# EAGLE board SoftDrink-BoardFile (EAGLE 9.2.2)
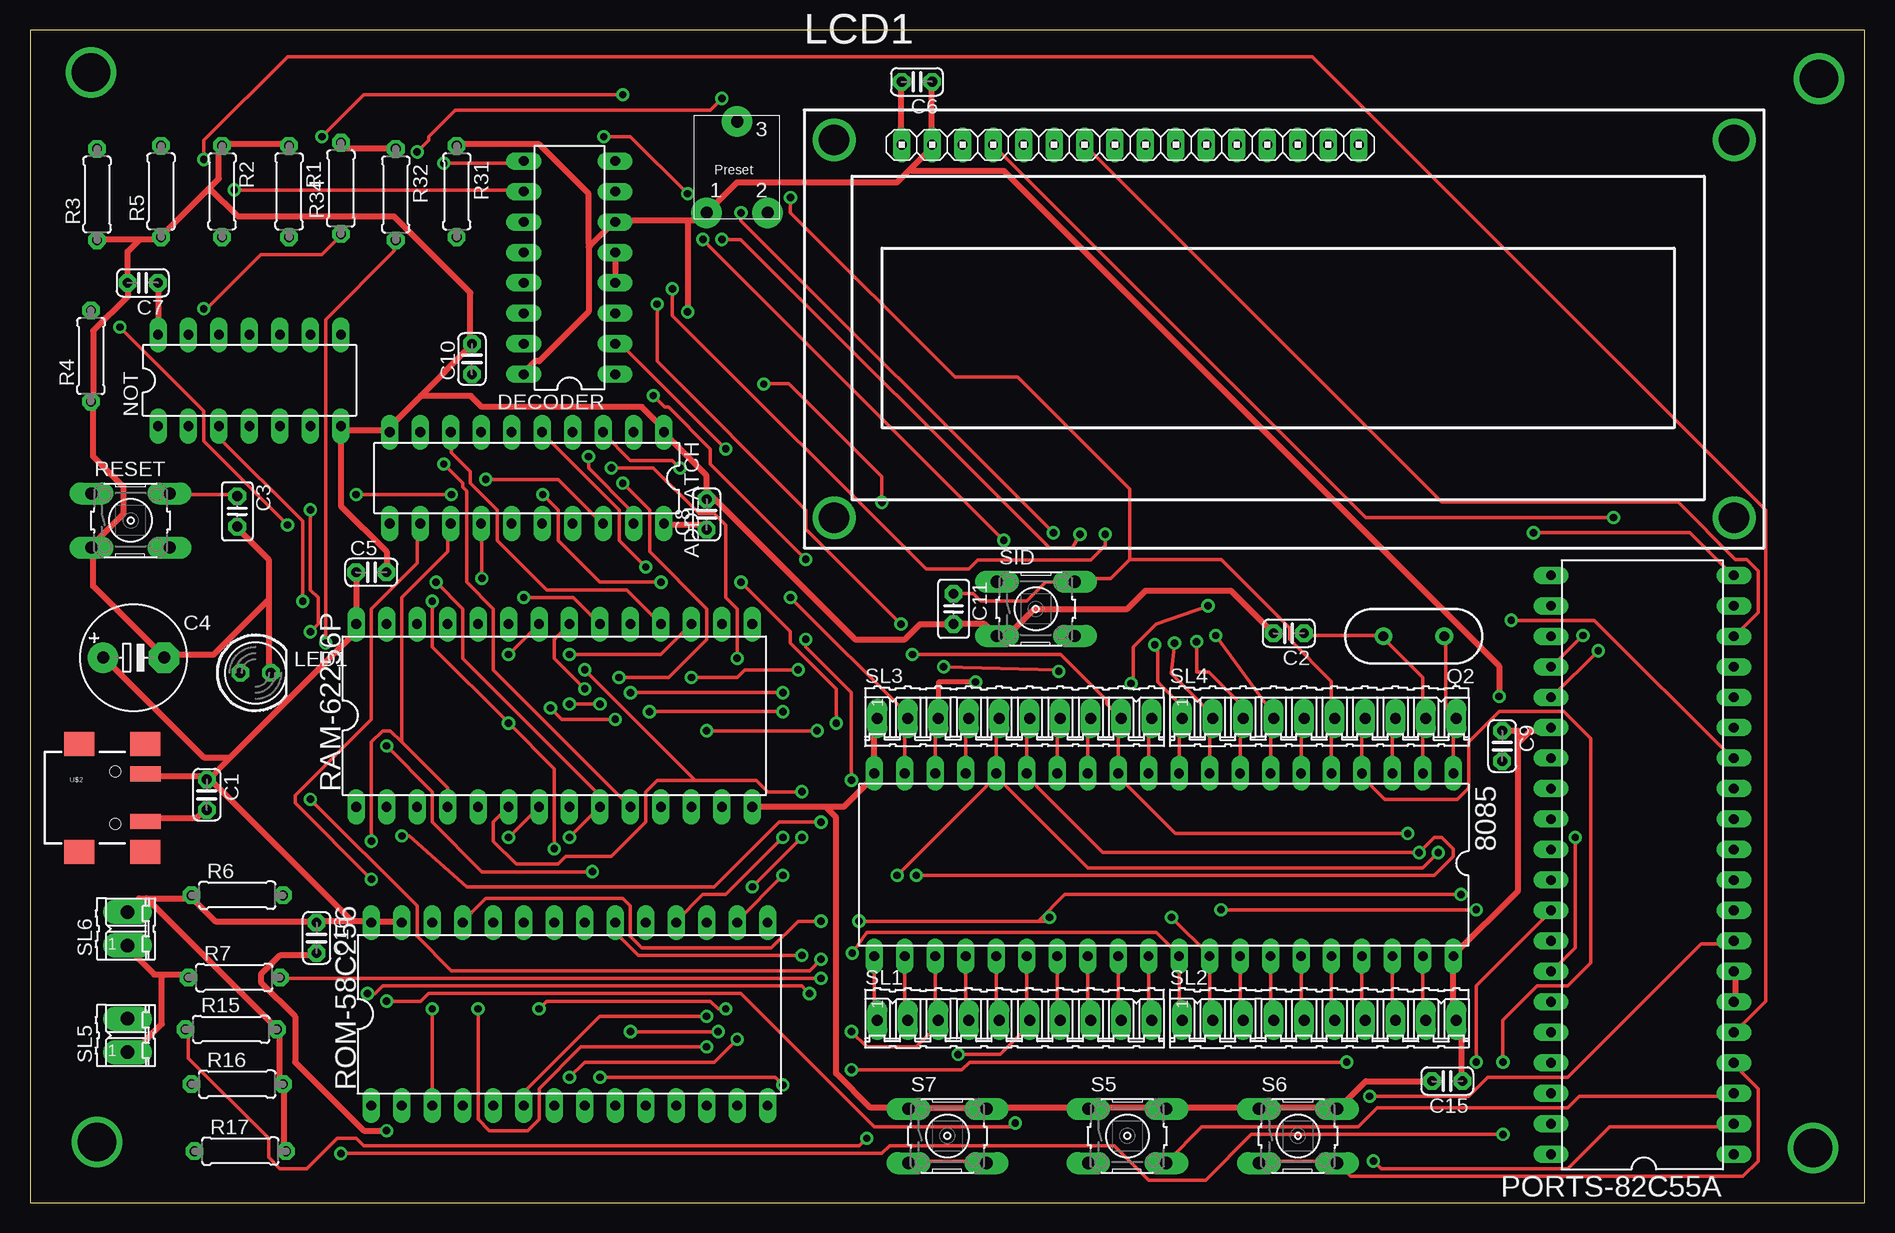
[diagram p0: board, top side]
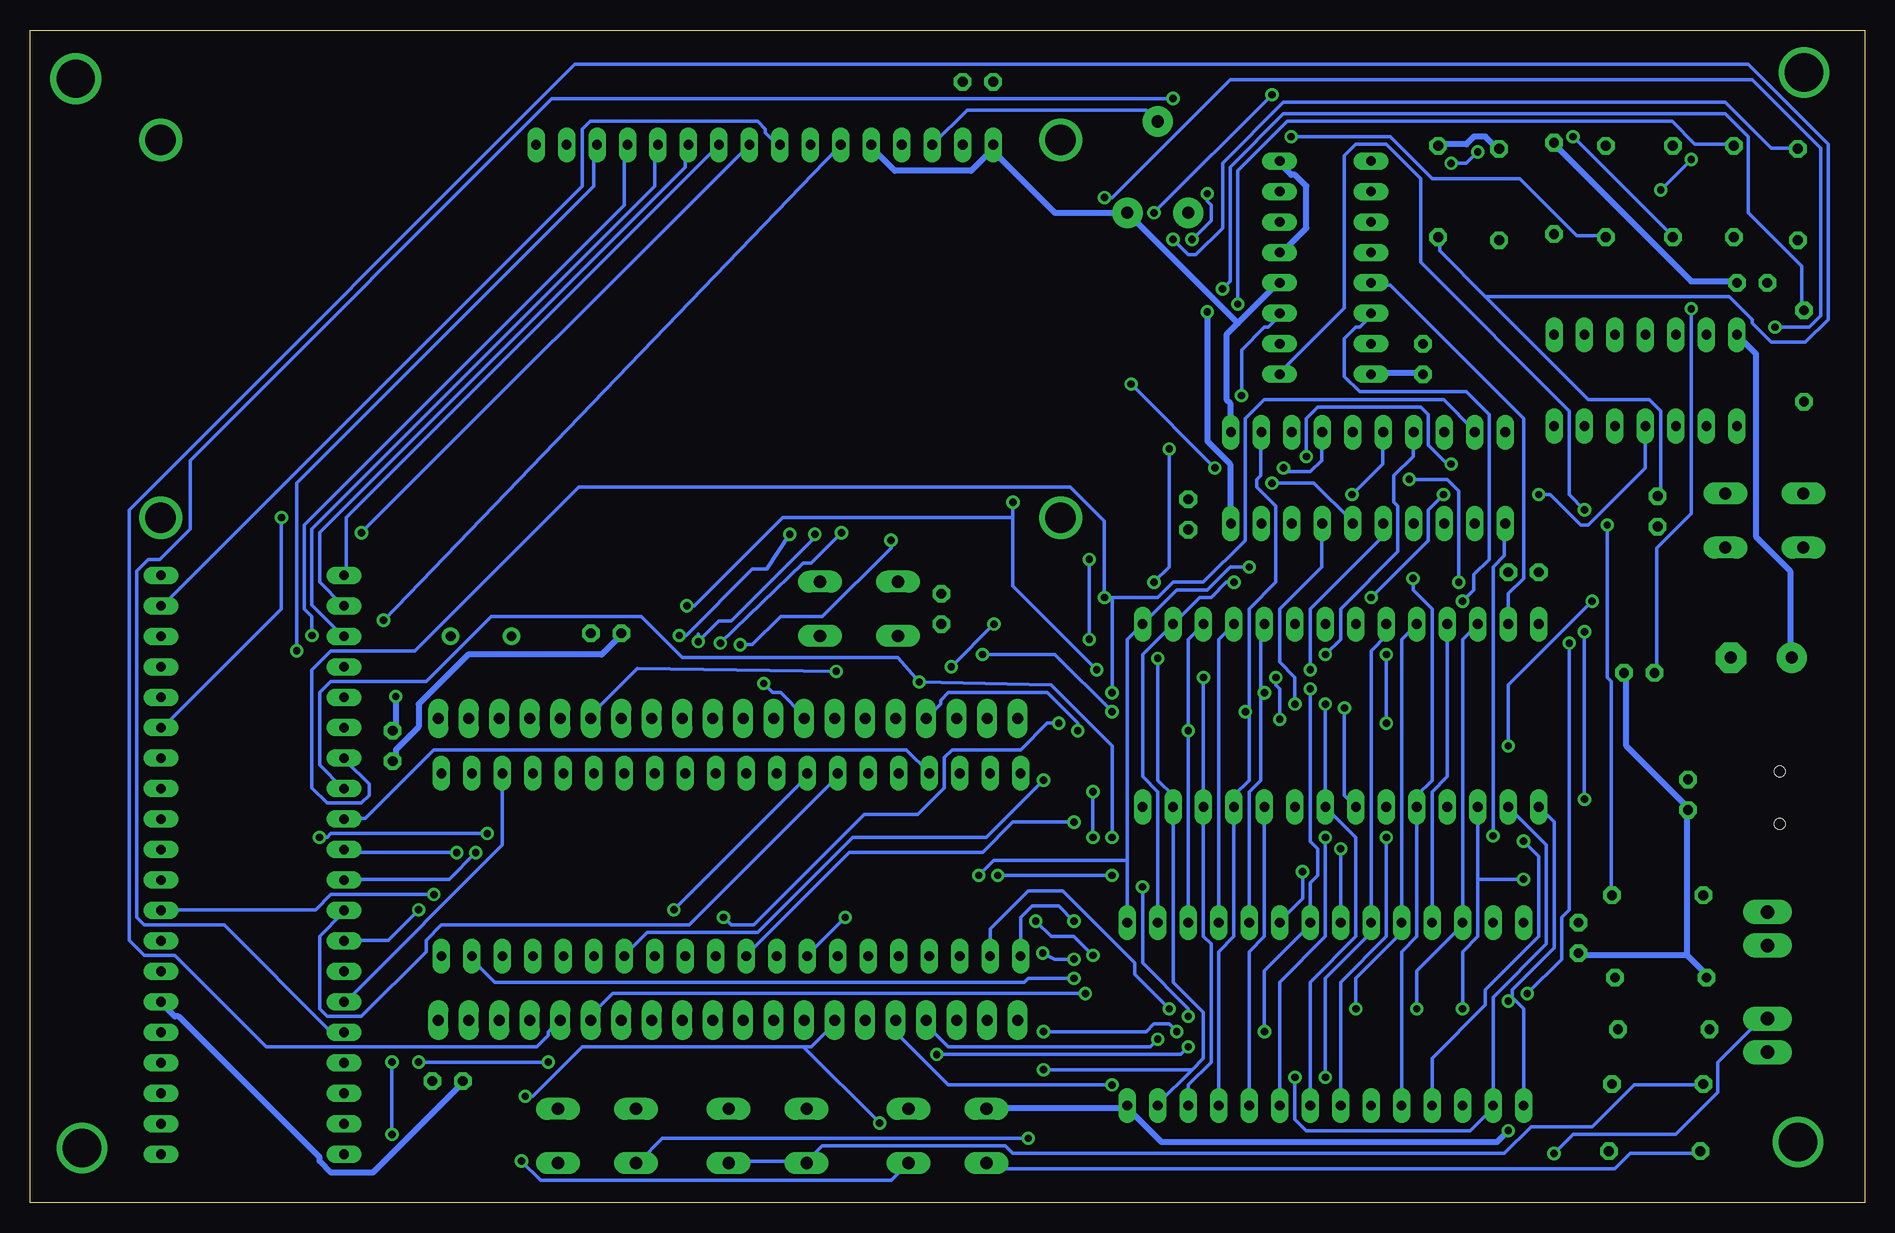
[diagram p1: board, bottom side, seen from below]

Size 152.91 x 97.79 mm. Coordinates in mm from the lower left corner, seen from the top.
Outline: 0,0 152.91,0 152.91,97.79 0,97.79 0,0
Copper layers (1*16): Top 0.035mm / dielectric 1.5mm / Bottom 0.035mm
Design rules "default *": minimum track width 10mil, minimum drill 24mil, track to track 12mil, track to pad 12mil, pad to pad 12mil, via to via 12mil, smd to smd 12mil, copper to edge 40mil, drill to drill 8mil, minimum pad ring 12mil, minimum via ring 8mil, stop-mask expansion 4mil, vias tented up to drill 0mil, thermal gap 10mil
Net classes: 0 default: width 0.305 mm; 1 VCC: width 0.508 mm; 2 GND: width 0.508 mm

## Footprints (pad centres in the part's own frame; a part is rotated, then mirrored left to right if it is on the bottom)
DIL40 = drill 0.813 long: 1 -24.13,-7.62; 2 -21.59,-7.62; 3 -19.05,-7.62; 4 -16.51,-7.62; 5 -13.97,-7.62; 6 -11.43,-7.62; 7 -8.89,-7.62; 8 -6.35,-7.62; 9 -3.81,-7.62; 10 -1.27,-7.62; 11 1.27,-7.62; 12 3.81,-7.62; 13 6.35,-7.62; 14 8.89,-7.62; 15 11.43,-7.62; 16 13.97,-7.62; 17 16.51,-7.62; 18 19.05,-7.62; 19 21.59,-7.62; 20 24.13,-7.62; 21 24.13,7.62; 22 21.59,7.62; 23 19.05,7.62; 24 16.51,7.62; 25 13.97,7.62; 26 11.43,7.62; 27 8.89,7.62; 28 6.35,7.62; 29 3.81,7.62; 30 1.27,7.62; 31 -1.27,7.62; 32 -3.81,7.62; 33 -6.35,7.62; 34 -8.89,7.62; 35 -11.43,7.62; 36 -13.97,7.62; 37 -16.51,7.62; 38 -19.05,7.62; 39 -21.59,7.62; 40 -24.13,7.62
DIL20 = drill 0.813 long: 1 -11.43,-3.81; 2 -8.89,-3.81; 3 -6.35,-3.81; 4 -3.81,-3.81; 5 -1.27,-3.81; 6 1.27,-3.81; 7 3.81,-3.81; 8 6.35,-3.81; 9 8.89,-3.81; 10 11.43,-3.81; 11 11.43,3.81; 12 8.89,3.81; 13 6.35,3.81; 14 3.81,3.81; 15 1.27,3.81; 16 -1.27,3.81; 17 -3.81,3.81; 18 -6.35,3.81; 19 -8.89,3.81; 20 -11.43,3.81
C025-024X044 = drill 0.813 octagon: 1 -1.27,0; 2 1.27,0
C025-025X050 = drill 0.813 octagon: 1 -1.27,0; 2 1.27,0
E5-8,5 = drill 1.016 pad 2.54: + -2.54,0 | drill 1.016 pad 2.54 octagon: - 2.54,0
DIL16 = drill 0.813 long: 1 -8.89,-3.81; 2 -6.35,-3.81; 3 -3.81,-3.81; 4 -1.27,-3.81; 5 1.27,-3.81; 6 3.81,-3.81; 7 6.35,-3.81; 8 8.89,-3.81; 9 8.89,3.81; 10 6.35,3.81; 11 3.81,3.81; 12 1.27,3.81; 13 -1.27,3.81; 14 -3.81,3.81; 15 -6.35,3.81; 16 -8.89,3.81
16X2_LCD = drill 0.813 long: 1 8.12,33.608; 2 10.66,33.608; 3 13.2,33.608; 4 15.74,33.608; 5 18.28,33.608; 6 20.82,33.608; 7 23.36,33.608; 8 25.9,33.608; 9 28.44,33.608; 10 30.98,33.608; 11 33.52,33.608; 12 36.06,33.608; 13 38.6,33.608; 14 41.14,33.608; 15 43.68,33.608; 16 46.22,33.608 | drill 2.54: P$1 2.5,34; P$2 2.5,2.5; P$3 77.5,2.5; P$4 77.5,34
LED5MM = drill 0.813 octagon: A -1.27,0; K 1.27,0
DIL14 = drill 0.813 long: 1 -7.62,-3.81; 2 -5.08,-3.81; 3 -2.54,-3.81; 4 0,-3.81; 5 2.54,-3.81; 6 5.08,-3.81; 7 7.62,-3.81; 8 7.62,3.81; 9 5.08,3.81; 10 2.54,3.81; 11 0,3.81; 12 -2.54,3.81; 13 -5.08,3.81; 14 -7.62,3.81
HC49US = drill 0.813: 1 -2.54,0; 2 2.54,0
0207/7 = drill 0.813 octagon: 1 -3.81,0; 2 3.81,0
DIL28-6 = drill 0.813 long: 1 -16.51,-7.62; 2 -13.97,-7.62; 3 -11.43,-7.62; 4 -8.89,-7.62; 5 -6.35,-7.62; 6 -3.81,-7.62; 7 -1.27,-7.62; 8 1.27,-7.62; 9 3.81,-7.62; 10 6.35,-7.62; 11 8.89,-7.62; 12 11.43,-7.62; 13 13.97,-7.62; 14 16.51,-7.62; 15 16.51,7.62; 16 13.97,7.62; 17 11.43,7.62; 18 8.89,7.62; 19 6.35,7.62; 20 3.81,7.62; 21 1.27,7.62; 22 -1.27,7.62; 23 -3.81,7.62; 24 -6.35,7.62; 25 -8.89,7.62; 26 -11.43,7.62; 27 -13.97,7.62; 28 -16.51,7.62
B3F-10XX = drill 1.016 long: 1 -3.251,2.261; 2 3.251,2.261; 3 -3.251,-2.261; 4 3.251,-2.261
10P = drill 0.914 long: 1 -11.43,0; 2 -8.89,0; 3 -6.35,0; 4 -3.81,0; 5 -1.27,0; 6 1.27,0; 7 3.81,0; 8 6.35,0; 9 8.89,0; 10 11.43,0
02P = drill 1.143 long: 1 -1.397,0; 2 1.397,0
USB(POWER) = smd 2.54 x 1.27: GND 2.5,-1.981; VBUS 2.5,1.981 | smd 2.5 x 2: GND@1 -3,-4.5; GND@2 -3,4.5; GND@3 2.5,4.5; GND@4 2.5,-4.5 | hole 0.9: 0,2.2; 0,-2.2
PRESET_LR = drill 1.016 pad 2.54: P$1 -2.54,-3.81; P$2 2.54,-3.81; P$3 0,3.81

## Placement (x,y rotation side)
8085  [DIL40]  94.49,28.19 180 top
ADDLATCH  74HCT573N  [DIL20]  41.4,60.45 180 top
C1  0.1uf  [C025-024X044]  14.73,34.04 270 top
C2  22pf  [C025-024X044]  104.9,47.5 180 top
C3  [C025-025X050]  17.27,57.66 270 top
C4  10uF  [E5-8,5]  8.64,45.47 0 top
C5  .1uf  [C025-024X044]  28.45,52.58 0 top
C6  .1uf  [C025-024X044]  73.91,93.47 180 top
C7  0.1uF  [C025-024X044]  9.4,76.71 180 top
C8  .1uf  [C025-024X044]  56.39,57.4 90 top
C9  .1uf  [C025-024X044]  122.68,38.1 270 top
C10  .1uf  [C025-024X044]  36.83,70.36 90 top
C11  [C025-025X050]  76.96,49.53 270 top
C15  0.1uf  [C025-024X044]  118.11,10.16 180 top
C16  .1uf  [C025-024X044]  23.88,22.1 270 top
DECODER  74HCT138N  [DIL16]  44.96,77.98 90 top
LCD1  [16X2_LCD]  64.52,54.61 0 top
LED1  LED5MM  [LED5MM]  18.8,44.2 0 top
NOT  74HCT04N  [DIL14]  18.29,68.58 0 top
PORTS-82C55A  [DIL40]  134.37,28.19 90 top
Q2  [HC49US]  115.32,47.24 180 top
R1  10k  [0207/7]  21.59,84.33 270 top
R2  10k  [0207/7]  16,84.33 270 top
R3  10k  [0207/7]  5.59,84.07 90 top
R4  10k  [0207/7]  5.08,70.61 90 top
R5  10k  [0207/7]  10.92,84.33 90 top
R6  10k  [0207/7]  17.27,25.65 0 top
R7  10k  [0207/7]  17.02,18.8 0 top
R15  10k  [0207/7]  16.76,14.48 0 top
R16  10k  [0207/7]  17.27,9.91 0 top
R17  10k  [0207/7]  17.53,4.32 0 top
R31  10k  [0207/7]  35.56,84.33 270 top
R32  10k  [0207/7]  30.48,84.07 270 top
R34  10k  [0207/7]  25.91,84.58 90 top
RAM-62256P  [DIL28-6]  43.69,40.64 0 top
RESET  [B3F-10XX]  8.38,56.9 0 top
ROM-58C256  [DIL28-6]  44.96,15.75 0 top
S5  [B3F-10XX]  91.44,5.59 0 top
S6  [B3F-10XX]  105.66,5.59 0 top
S7  [B3F-10XX]  76.45,5.59 0 top
SID  [B3F-10XX]  83.82,49.53 0 top
SL1  [10P]  82.04,15.24 0 top
SL2  [10P]  107.44,15.24 0 top
SL3  [10P]  82.04,40.39 0 top
SL4  [10P]  107.44,40.39 0 top
SL5  [02P]  8.13,13.97 90 top
SL6  [02P]  8.13,22.86 90 top
U$2  USB(POWER)  [USB(POWER)]  7.11,33.78 0 top
U$3  PRESET_LR  [PRESET_LR]  58.93,86.36 0 top

## Library data of the parts
8085 = micro-intel; OC_FARNELL: unknown; OC_NEWARK: unknown
ADDLATCH DECODER NOT = 74xx-eu
C1-C11 C15 C16 R1-R7 R15-R17 R31 R32 R34 = rcl
LCD1 LED1 S5-S7 = CEDTv79
PORTS-82C55A = micro-intel; MF: INTERSIL; MPN: IP82C55AZ; OC_FARNELL: 1562050; OC_NEWARK: 79K6939
Q2 RESET SID = CEDT
RAM-62256P = memory-hitachi; OC_FARNELL: unknown; OC_NEWARK: unknown
ROM-58C256 = memory-hitachi; MPN: HN58C256AP85E; OC_FARNELL: 1496447; OC_NEWARK: 61M6616
SL1-SL4 = con-amp-quick; OC_FARNELL: unknown; OC_NEWARK: unknown
SL5 SL6 U$2 U$3 = CEDT_JANUARY_2015_v5

## Nets
A: LCD1.15
A8: 8085.21 RAM-62256P.25 ROM-58C256.25 SL1.1
A9: 8085.22 RAM-62256P.24 ROM-58C256.24 SL1.2
A10: 8085.23 RAM-62256P.21 ROM-58C256.21 SL1.3
A11: 8085.24 RAM-62256P.23 ROM-58C256.23 SL1.4
A12: 8085.25 RAM-62256P.2 ROM-58C256.2 SL1.5
A13: 8085.26 RAM-62256P.26 ROM-58C256.26 SL1.6
A14: 8085.27 PORTS-82C55A.8 RAM-62256P.1 ROM-58C256.1 SL1.7
A15: 8085.28 NOT.3 PORTS-82C55A.9 ROM-58C256.20 SL1.8
AD0: 8085.12 ADDLATCH.2 PORTS-82C55A.34 RAM-62256P.11 ROM-58C256.11 SL3.9
AD1: 8085.13 ADDLATCH.3 PORTS-82C55A.33 RAM-62256P.12 ROM-58C256.12 SL3.8
AD2: 8085.14 ADDLATCH.4 PORTS-82C55A.32 RAM-62256P.13 ROM-58C256.13 SL3.7
AD3: 8085.15 ADDLATCH.5 PORTS-82C55A.31 RAM-62256P.15 ROM-58C256.15 SL3.6
AD4: 8085.16 ADDLATCH.6 PORTS-82C55A.30 RAM-62256P.16 ROM-58C256.16 SL3.5
AD5: 8085.17 ADDLATCH.7 PORTS-82C55A.29 RAM-62256P.17 ROM-58C256.17 SL3.4
AD6: 8085.18 ADDLATCH.8 PORTS-82C55A.28 RAM-62256P.18 ROM-58C256.18 SL3.3
AD7: 8085.19 ADDLATCH.9 PORTS-82C55A.27 RAM-62256P.19 ROM-58C256.19 SL3.2
ALE: 8085.30 ADDLATCH.11 SL1.10
CLK: 8085.37 SL2.7
CNT: LCD1.3 U$3.P$3
D0: LCD1.7 PORTS-82C55A.18
D1: LCD1.8 PORTS-82C55A.19
D2: LCD1.9 PORTS-82C55A.20
D3: LCD1.10 PORTS-82C55A.21
D4: LCD1.11 PORTS-82C55A.22
D5: LCD1.12 PORTS-82C55A.23
D6: LCD1.13 PORTS-82C55A.24
D7: LCD1.14 PORTS-82C55A.25
EN: LCD1.6 PORTS-82C55A.14
GND [GND]: 8085.20 ADDLATCH.1 ADDLATCH.10 C1.2 C2.2 C3.2 C4.- C5.2 C6.2 C7.2 C8.2 C9.2 C10.2 C11.2 C15.2 C16.2 DECODER.4 DECODER.5 DECODER.8 LCD1.1 LCD1.5 LED1.K NOT.7 PORTS-82C55A.6 PORTS-82C55A.7 R1.1 R2.1 R3.1 R4.1 R5.1 R7.1 RAM-62256P.14 RESET.3 ROM-58C256.14 S5.1 S5.2 S6.1 S6.2 S7.1 S7.2 SID.3 SL3.1 SL5.1 SL6.1 U$2.GND U$3.P$2
HLDA: 8085.38 SL2.8
HOLD: 8085.39 R7.2 SL2.9
INTA: 8085.11 SL3.10
INTR: 8085.10 R1.2 SL4.1
IO/M: 8085.34 DECODER.3 SL2.4
K: LCD1.16
N$10: ADDLATCH.19 RAM-62256P.10 ROM-58C256.10
N$11: ADDLATCH.18 RAM-62256P.9 ROM-58C256.9
N$12: ADDLATCH.17 RAM-62256P.8 ROM-58C256.8
N$13: ADDLATCH.16 RAM-62256P.7 ROM-58C256.7
N$14: ADDLATCH.15 RAM-62256P.6 ROM-58C256.6
N$15: ADDLATCH.14 RAM-62256P.5 ROM-58C256.5
N$16: ADDLATCH.13 RAM-62256P.4 ROM-58C256.4
N$17: ADDLATCH.12 RAM-62256P.3 ROM-58C256.3
N$28: DECODER.9 PORTS-82C55A.36
N$44: LED1.A R34.1
N$47: PORTS-82C55A.4 R15.1 S6.3 S6.4
N$49: PORTS-82C55A.2 R17.1 S7.3 S7.4
N$50: PORTS-82C55A.3 R16.1 S5.3 S5.4
N$57: DECODER.14 RAM-62256P.22 ROM-58C256.22
N$58: DECODER.13 RAM-62256P.27
N$60: NOT.4 RAM-62256P.20
N$80: DECODER.10 PORTS-82C55A.5
RD: 8085.32 DECODER.2 SL2.2
READY: 8085.35 R32.2 SL2.5
RES_IN: 8085.36 C3.1 R31.2 RESET.2 SL2.6
RES_OUT: 8085.3 PORTS-82C55A.35 SL4.8
RS: LCD1.4 PORTS-82C55A.15
RST5_5: 8085.9 R2.2 SL4.2
RST6_5: 8085.8 R3.2 SL4.3
RST7_5: 8085.7 R4.2 SL4.4
S0: 8085.29 SL1.9
S1: 8085.33 SL2.3
SID: 8085.5 C11.1 R6.2 SID.2 SL4.6
SOD: 8085.4 SL4.7 SL5.2
TRAP: 8085.6 R5.2 SL4.5
VCC [VCC]: 8085.40 ADDLATCH.20 C1.1 C4.+ C5.1 C6.1 C7.1 C8.1 C9.1 C10.1 C15.1 C16.1 DECODER.6 DECODER.16 LCD1.2 NOT.14 PORTS-82C55A.26 R6.1 R15.2 R16.2 R17.2 R31.1 R32.1 R34.2 RAM-62256P.28 ROM-58C256.27 ROM-58C256.28 SL2.10 SL6.2 U$2.VBUS U$3.P$1
WR: 8085.31 DECODER.1 SL2.1
X1: 8085.1 Q2.1 SL4.10
X2: 8085.2 C2.1 Q2.2 SL4.9

## Tracks (layer width: path | path; a pad name or v marks a point on that pad's centre or on a via)
A8  (via drill 0.61)
  Top 0.305: 8085.21 70.36,15.24 SL1.1 | v65.91,23.5 64.01,23.5 61.79,21.27 50.99,21.27 50.04,22.22 50.04,24.77 49.4,25.4 37.97,25.4 36.07,23.5 ROM-58C256.25
  Bottom 0.305: RAM-62256P.25 34.8,35.56 36.07,34.29 ROM-58C256.25 | 8085.21 70.36,23.81 69.41,24.77 67.18,24.77 v65.91,23.5
A9  (via drill 0.61)
  Top 0.305: 8085.22 72.9,15.24 SL1.2 | v57.98,16.19 57.34,16.19 56.71,16.83 43.05,16.83 v42.42,16.19
  Bottom 0.305: RAM-62256P.24 38.61,46.99 ROM-58C256.24 38.61,22.54 42.42,18.73 v42.42,16.19 | 8085.22 72.9,22.86 69.72,26.04 66.87,26.04 60.83,20 60.83,19.05 v57.98,16.19
A10  (via drill 0.61)
  Top 0.305: 75.44,15.24 8085.23 | v46.23,42.86 43.69,45.4 43.69,46.99 RAM-62256P.21 | 75.44,15.24 75.44,14.61 73.85,13.02 69.72,13.02 v68.45,14.29 | v50.04,14.29 v57.34,14.29 | 75.44,15.24 SL1.3
  Bottom 0.305: v46.23,42.86 46.23,30.16 45.59,29.53 45.59,27.3 46.23,26.67 ROM-58C256.21 46.23,23.18 50.04,19.37 v50.04,14.29 | v68.45,14.29 59.88,14.29 59.25,14.92 57.98,14.92 v57.34,14.29
A11  (via drill 0.61)
  Top 0.305: 8085.24 77.98,15.24 SL1.4 | v58.93,13.65 57.02,11.75 46.23,11.75 v44.96,10.48
  Bottom 0.305: RAM-62256P.23 39.88,47.31 41.15,46.04 ROM-58C256.23 41.15,22.54 44.96,18.73 v44.96,10.48 | v58.93,13.65 59.56,13.02 76.39,13.02 77.98,14.61 77.98,15.24 SL1.4
A12  (via drill 0.61)
  Top 0.305: 8085.25 80.52,15.24 SL1.5 | v62.74,9.84 62.1,10.48 v47.5,10.48
  Bottom 0.305: RAM-62256P.2 26.54,29.84 26.54,21.59 30.99,17.14 ROM-58C256.2 30.99,7.94 32.89,6.03 46.55,6.03 47.5,6.98 v47.5,10.48 | v62.74,9.84 76.39,9.84 80.52,13.97 80.52,15.24 SL1.5
A13  (via drill 0.61)
  Top 0.305: 83.06,15.24 8085.26 | 83.06,15.24 83.06,14.61 80.84,12.38 v77.34,12.38 | v56.39,13.02 45.91,13.02 42.42,9.53 42.42,6.98 41.47,6.03 38.29,6.03 37.34,6.98 v37.34,16.19 | 83.06,15.24 SL1.6
  Bottom 0.305: RAM-62256P.26 33.53,46.99 ROM-58C256.26 33.53,23.18 37.34,19.37 v37.34,16.19 | v77.34,12.38 57.02,12.38 v56.39,13.02
A14  (via drill 0.61)
  Top 0.305: 8085.27 85.6,15.24 SL1.7 | v111.63,8.89 119.89,8.89 121.48,10.48 128.14,10.48 139.25,21.59 141.8,21.59 PORTS-82C55A.8 | v29.72,16.83 32.58,16.83 33.21,17.46 59.25,17.46 70.36,6.35 81.79,6.35 v82.11,6.67
  Bottom 0.305: ROM-58C256.1 28.45,16.19 29.4,17.14 | 29.4,17.14 29.4,17.78 25.91,21.27 25.91,31.75 RAM-62256P.1 | v111.63,8.89 111,8.89 106.87,13.02 88.46,13.02 | 88.46,13.02 87.82,13.02 85.6,15.24 SL1.7 | v29.72,16.83 29.4,17.14 | 88.46,13.02 v82.11,6.67
A15  (via drill 0.61)
  Top 0.305: ROM-58C256.20 48.77,22.54 50.67,20.64 v64.33,20.64 | 84.01,23.5 84.65,23.5 v84.96,23.81 | 84.01,23.5 v69.09,23.5 | NOT.3 15.75,63.82 22.73,56.83 v22.73,50.17 | v29.72,38.1 33.53,34.29 33.53,31.75 37.66,27.62 v46.86,27.62 | v119.25,25.72 86.23,25.72 84.01,23.5 | 8085.28 88.14,15.24 SL1.8
  Bottom 0.305: v64.33,20.64 65.91,22.22 67.82,22.22 v69.09,23.5 | v84.96,23.81 88.14,20.64 8085.28 | v22.73,50.17 29.72,43.18 v29.72,38.1 | v46.86,27.62 46.86,25.4 48.77,23.5 ROM-58C256.20 | v119.25,25.72 127.83,25.72 129.09,24.45 141.8,24.45 PORTS-82C55A.9
AD0  (via drill 0.61)
  Top 0.305: v128.78,30.48 128.78,21.27 126.87,19.37 PORTS-82C55A.34 | v114.81,30.8 95.44,30.8 90.68,35.56 8085.12 90.68,40.32 SL3.9 89.73,41.59 89.73,41.91 85.92,45.72 v73.53,45.72 | v51.62,40.96 v62.74,40.96
  Bottom 0.305: v128.78,30.48 128.14,30.48 127.83,30.8 v114.81,30.8 | ROM-58C256.11 53.85,20.95 52.58,22.22 RAM-62256P.11 52.58,33.97 51.31,35.24 51.31,40.96 | 51.31,40.96 51.31,49.53 49.09,51.75 49.09,58.1 50.67,59.69 50.67,60.33 50.36,60.64 50.36,64.14 ADDLATCH.2 | v73.53,45.72 67.5,45.72 v62.74,40.96 | 51.31,40.96 v51.62,40.96
AD1  (via drill 0.61)
  Top 0.305: 8085.13 88.14,40.32 SL3.8 | v99.25,24.45 v120.52,24.45 | v54.17,61.28 53.53,61.91 50.04,61.91 47.82,64.14 ADDLATCH.3 | v64.01,44.45 59.56,44.45 58.93,43.82 v55.12,43.82 | v98.17,49.78 93.85,48.26 91.95,46.36 91.95,43.62 v91.76,43.31 | v70.99,58.42 70.99,60.58 63.25,68.33 61.21,68.33 v61.15,68.26
  Bottom 0.305: v120.52,24.45 123.06,21.91 126.56,21.91 PORTS-82C55A.33 | v99.25,24.45 88.14,35.56 8085.13 | ROM-58C256.12 56.39,9.84 54.48,11.75 54.48,21.59 55.12,22.22 RAM-62256P.12 v55.12,43.82 | v61.15,68.26 v54.17,61.28 | 70.99,57.15 70.99,51.44 v64.01,44.45 | 70.99,57.15 v70.99,58.42 | 70.99,57.15 90.17,57.15 97.54,49.78 v98.17,49.78 | SL3.8 88.46,40.64 90.36,42.55 91,42.55 v91.76,43.31
AD2  (via drill 0.61)
  Top 0.305: 8085.14 85.6,40.32 SL3.7 | v48.45,61.28 51.94,61.28 55.75,57.47 57.02,57.47 57.98,56.52 57.98,50.48 58.93,49.53 v58.93,45.4 | v120.52,11.75 120.52,18.1 126.56,24.13 PORTS-82C55A.32 | v109.73,11.75 78.3,11.75 77.66,11.11 v68.45,11.11
  Bottom 0.305: PORTS-82C55A.32 126.87,24.13 128.78,22.22 128.78,16.19 128.14,15.56 125.29,15.56 119.89,20.95 119.89,21.91 118.62,23.18 97.98,23.18 85.6,35.56 8085.14 | 56.07,11.11 58.93,8.26 ROM-58C256.13 | 56.07,11.11 55.12,12.06 55.12,15.88 57.66,18.41 RAM-62256P.13 57.66,33.97 58.93,35.24 v58.93,45.4 | v48.45,61.28 48.13,60.96 46.23,60.96 45.28,61.91 45.28,64.14 ADDLATCH.4 | v109.73,11.75 v120.52,11.75 | 56.07,11.11 v68.45,11.11
AD3  (via drill 0.61)
  Top 0.305: SL3.6 83.06,40.32 8085.15 83.06,35.56 89.41,29.21 v115.76,29.21 117.03,30.48 117.67,30.48 118.62,29.53 118.62,28.89 117.03,27.3 v73.85,27.3 | v51.31,53.02 49.09,55.25 49.09,57.79 42.74,64.14 ADDLATCH.5
  Bottom 0.305: v115.76,29.21 117.98,26.99 126.56,26.99 PORTS-82C55A.31 | 61.47,28.57 61.47,46.99 RAM-62256P.15 57.34,51.12 54.8,51.12 52.89,53.02 v51.31,53.02 | 61.47,28.57 ROM-58C256.15 | v73.85,27.3 72.58,28.57 61.47,28.57
AD4  (via drill 0.61)
  Top 0.305: SL3.5 80.52,40.32 8085.16 80.52,35.56 | v117.35,29.21 116.08,27.94 88.14,27.94 80.52,35.56 | v42.74,59.05 44,57.79 44,55.25 47.5,51.75 v52.58,51.75 | v72.26,27.3 80.52,35.56 | v62.74,27.3 58.93,23.5 ROM-58C256.16
  Bottom 0.305: v117.35,29.21 126.56,29.21 PORTS-82C55A.30 | ROM-58C256.16 58.93,34.29 60.2,35.56 60.2,45.72 RAM-62256P.16 55.43,50.48 54.48,50.48 53.21,51.75 v52.58,51.75 | v42.74,59.05 40.2,61.6 40.2,64.14 ADDLATCH.6 | v62.74,27.3 v72.26,27.3
AD5  (via drill 0.61)
  Top 0.305: 8085.17 77.98,40.32 SL3.4 | v44.96,45.72 52.58,45.72 RAM-62256P.17 | v56.39,39.37 v65.6,39.37
  Bottom 0.305: PORTS-82C55A.29 126.56,32.07 124.97,32.07 119.25,37.78 79.88,37.78 77.98,35.88 8085.17 | ROM-58C256.17 v56.39,39.37 56.39,46.99 RAM-62256P.17 | v44.96,45.72 43.69,46.99 43.69,49.53 38.93,54.29 38.93,58.1 39.24,58.42 39.24,60.64 37.66,62.23 37.66,64.14 ADDLATCH.7 | SL3.4 77.03,41.59 77.03,41.91 76.39,42.55 68.14,42.55 65.6,40.01 v65.6,39.37
AD6  (via drill 0.61)
  Top 0.305: RAM-62256P.18 49.72,51.12 43.05,51.12 38.93,55.25 38.93,57.79 36.7,60.01 36.7,60.96 35.12,62.55 35.12,64.14 ADDLATCH.8 | 75.76,40.64 SL3.3 75.44,40.32 8085.18 | v62.74,30.48 57.98,25.72 56.07,25.72 53.85,23.5 ROM-58C256.18
  Top 0.406: v78.8,43.43 75.69,43.43 SL3.3
  Bottom 0.305: ROM-58C256.18 53.85,46.99 RAM-62256P.18 | PORTS-82C55A.28 126.87,34.61 128.78,36.51 128.78,42.55 127.83,43.5 119.89,43.5 114.49,48.9 101.98,48.9 98.55,45.47 80.58,45.47 v78.8,43.43 67.82,43.18 62.74,38.1 v62.74,30.48
AD7  (via drill 0.61)
  Top 0.305: v63.37,50.48 73.22,40.64 SL3.2 72.9,40.32 8085.19 | v62.74,42.55 v50.04,42.55
  Bottom 0.305: ROM-58C256.19 51.31,34.29 50.36,35.24 50.36,42.55 | 50.36,42.55 50.36,47.94 RAM-62256P.19 | 62.74,50.48 v63.37,50.48 63.37,56.83 66.23,59.69 107.19,59.69 120.84,46.04 127.83,46.04 129.41,44.45 129.41,34.61 128.14,33.34 125.29,33.34 124.65,33.97 124.65,34.93 126.56,36.83 PORTS-82C55A.27 | 62.74,50.48 58.93,50.48 57.66,51.75 55.12,51.75 51.62,55.25 51.62,65.41 50.04,66.99 35.12,66.99 32.58,64.45 ADDLATCH.9 | v50.04,42.55 50.36,42.55 | 62.74,50.48 v62.74,42.55
ALE  (via drill 0.61)
  Top 0.305: v30.99,30.61 31.62,30.61 36.39,26.35 57.02,26.35 62.42,31.75 v65.91,31.75 | 8085.30 93.22,15.24 SL1.10
  Bottom 0.305: v30.99,30.61 30.99,53.02 30.04,53.98 30.04,56.52 ADDLATCH.11 | v65.91,31.75 70.99,31.75 73.53,29.21 84.65,29.21 93.22,20.64 8085.30
CLK
  Top 0.305: 8085.37 111,15.24 SL2.7
CNT
  Bottom 0.305: U$3.P$3 59.88,91.12 74.8,91.12 77.66,88.27 LCD1.3
D0
  Top 0.305: LCD1.7 88.14,87.95 117.67,58.42 137.35,58.42 142.11,53.66 143.06,53.66 144.02,52.71 144.02,49.21 142.11,47.31 PORTS-82C55A.18
D1
  Bottom 0.305: LCD1.8 90.68,88.27 91.63,89.22 91.63,89.53 92.27,90.17 106.23,90.17 106.87,89.53 106.87,84.77 141.8,49.85 PORTS-82C55A.19
D2  (via drill 0.61)
  Top 0.305: v125.29,55.88 138.3,55.88 141.8,52.39 PORTS-82C55A.20
  Bottom 0.305: v125.29,55.88 93.22,87.95 LCD1.9
D3
  Bottom 0.305: PORTS-82C55A.21 126.56,52.39 126.56,57.15 95.76,87.95 LCD1.10
D4
  Bottom 0.305: PORTS-82C55A.22 126.87,49.85 128.78,51.75 128.78,55.88 98.3,86.36 98.3,87.95 LCD1.11
D5
  Bottom 0.305: PORTS-82C55A.23 126.87,47.31 129.41,49.85 129.41,56.2 100.84,84.77 100.84,87.95 LCD1.12
D6  (via drill 0.61)
  Top 0.305: v129.41,47.31 126.87,44.77 PORTS-82C55A.24
  Bottom 0.305: v129.41,47.31 129.41,48.9 130.05,49.53 130.05,56.52 103.38,83.19 103.38,87.95 LCD1.13
D7  (via drill 0.61)
  Top 0.305: v130.68,46.04 126.87,42.23 PORTS-82C55A.25
  Bottom 0.305: v130.68,46.04 130.68,60.01 105.92,84.77 105.92,87.95 LCD1.14
EN  (via drill 0.61)
  Top 0.305: v123.44,48.58 130.37,48.58 141.8,37.15 PORTS-82C55A.14
  Bottom 0.305: v123.44,48.58 85.6,87.95 LCD1.6
GND  (via drill 0.61)
  Top 0.508: 66.29,33.02 67.82,33.02 70.36,35.56 8085.20 70.36,40.32 SL3.1 | 66.29,33.02 RAM-62256P.14 | PORTS-82C55A.6 142.11,16.83 142.11,19.05 PORTS-82C55A.7 | C15.2 111.32,10.16 109.09,7.94 S6.2 108.78,7.94 102.43,7.94 S6.1 102.11,7.94 94.81,7.94 S5.2 94.49,7.94 88.46,7.94 S5.1 88.14,7.94 79.88,7.94 S7.2 79.57,7.94 73.22,7.94 S7.1 72.9,7.94 70.04,7.94 67.18,10.79 67.18,32.13 66.29,33.02 | R1.1 21.46,88.27 16.07,88.27 R2.1 15.75,87.95 15.75,85.41 14.95,84.61 | 9.14,80.33 10.67,80.33 R5.1 10.99,80.64 14.95,84.61 | 9.14,80.33 5.59,80.33 R3.1 | 19.88,50.29 19.88,53.66 17.34,56.2 C3.2 | 19.88,50.29 19.88,44.45 LED1.K | U$2.GND 9.72,32.07 13.84,32.07 14.48,32.7 C1.2 | 24,20.95 C16.2 23.68,20.64 20.83,20.64 19.24,19.05 19.24,18.41 22.1,15.56 22.1,11.75 27.81,6.03 v29.72,6.03 | 11.18,19.05 10.35,19.05 8.13,21.27 SL6.1 | 11.18,19.05 13.21,19.05 R7.1 | SL5.1 8.13,12.7 8.76,12.7 10.99,14.92 10.99,18.86 11.18,19.05 | 103.38,47.62 C2.2 100.08,51.05 92.96,51.05 91.44,49.53 83.69,49.53 81.47,47.31 80.84,47.31 SID.3 80.52,47.31 79.57,48.26 C11.2 74.17,48.26 72.9,46.99 68.77,46.99 56.39,59.37 | LCD1.1 72.58,88.27 72.58,93.34 C6.2 | C5.2 29.72,54.29 25.91,58.1 25.91,64.45 | 25.91,64.45 29.72,64.45 | 25.91,64.45 NOT.7 | 29.72,64.45 32.54,67.28 | 32.54,67.28 36.7,71.44 C10.2 36.7,71.75 36.7,75.88 30.35,82.23 17.34,82.23 14.95,84.61 | 29.72,64.45 ADDLATCH.10 | 56.39,59.37 C8.2 56.39,58.74 | 56.39,59.37 56.39,60.64 52.89,64.14 ADDLATCH.1 52.89,64.45 50.99,66.36 37.66,66.36 36.73,67.28 32.54,67.28 | DECODER.5 DECODER.4 | 9.14,80.33 8.13,79.31 C7.2 8.13,75.56 5.27,72.71 5.27,66.99 R4.1 5.27,66.67 5.27,62.23 7.81,59.69 7.81,57.47 5.27,54.93 RESET.3 5.27,54.61 5.27,51.44 10.99,45.72 C4.- 11.3,45.72 15.3,45.72 19.88,50.29
  Bottom 0.508: 61.47,7.94 72.9,7.94 S7.1 | PORTS-82C55A.6 141.8,16.51 140.84,15.56 140.53,15.56 128.78,3.81 128.78,3.49 127.83,2.54 124.33,2.54 116.71,10.16 C15.2 | 14.8,20.64 23.68,20.64 C16.2 | 14.8,20.64 13.21,19.05 R7.1 | 14.8,20.64 14.8,32.7 C1.2 14.8,33.02 19.88,38.1 19.88,44.13 LED1.K | C9.2 122.43,36.83 122.43,37.78 120.52,39.69 120.52,41.59 116.4,45.72 105.28,45.72 103.7,47.31 C2.2 | LCD1.5 82.74,87.95 80.84,86.04 74.48,86.04 72.58,87.95 LCD1.1 72.58,87.63 67.5,82.55 U$3.P$2 52.26,73.34 | DECODER.8 48.77,86.68 47.82,85.72 47.5,85.72 46.55,84.77 46.55,81.28 48.77,79.06 DECODER.5 | ADDLATCH.1 52.89,64.45 52.89,66.67 53.21,66.99 53.21,72.39 52.26,73.34 | DECODER.4 48.77,76.83 52.26,73.34 | 61.47,7.94 58.61,5.08 30.67,5.08 v29.72,6.03 | 61.47,7.94 ROM-58C256.14
HLDA
  Top 0.305: 8085.38 113.54,15.24 SL2.8
HOLD  (via drill 0.61)
  Top 0.305: v65.91,18.73 20.83,18.73 R7.2 | 8085.39 116.08,15.24 SL2.9
  Bottom 0.305: v65.91,18.73 69.72,18.73 70.04,18.41 114.17,18.41 116.08,20.32 8085.39
INTA
  Top 0.305: 8085.11 93.22,40.32 SL3.10
INTR  (via drill 0.61)
  Top 0.305: v47.82,88.9 50.04,88.9 v54.8,84.14 | v81.15,55.25 v56.07,80.33 | 96.08,40.64 SL4.1 | 8085.10 95.76,40.32 SL4.1 | SL4.1 96.01,41.4 93.98,43.43 93.98,46.29 v93.73,46.55
  Bottom 0.305: v47.82,88.9 39.56,88.9 36.07,85.41 28.77,85.41 24,80.64 21.78,80.64 R1.2 | v54.8,84.14 54.8,83.5 54.48,83.19 54.48,81.91 v56.07,80.33 | v81.15,55.25 81.15,54.61 86.87,48.9 90.36,48.9 92.71,46.55 v93.73,46.55
IO/M  (via drill 0.61)
  Top 0.305: v51.94,67.31 52.89,66.36 53.21,66.36 56.71,62.87 56.71,61.6 v64.64,53.66 | v64.64,46.99 64.64,46.36 68.45,42.55 v68.45,35.24 | 8085.34 103.38,15.24 SL2.4
  Bottom 0.305: v51.94,67.31 51.94,71.12 50.04,73.02 49.72,73.02 48.77,73.98 DECODER.3 | v64.64,46.99 v64.64,53.66 | v68.45,35.24 73.22,30.48 84.33,30.48 92.27,22.54 101.47,22.54 103.38,20.64 8085.34
N$1  (via drill 3.2)
  other vias: 5.08,94.23
N$2  (via drill 3.2)
  other vias: 5.59,5.08
N$3  (via drill 3.2)
  other vias: 148.59,4.57
N$4  (via drill 3.2)
  other vias: 149.1,93.73
N$10  (via drill 0.61)
  Top 0.305: v46.55,62.23 46.55,61.28 50.04,57.79 50.04,56.83 ADDLATCH.19 | v34.48,61.6 36.07,60.01 36.07,59.69 36.39,59.37 36.39,51.75 38.61,49.53 38.61,44.45 RAM-62256P.10
  Bottom 0.305: ROM-58C256.10 51.31,20.95 50.04,22.22 RAM-62256P.10 | v46.55,62.23 46.55,65.41 45.59,66.36 37.02,66.36 36.39,65.72 36.39,63.18 34.8,61.6 v34.48,61.6
N$11  (via drill 0.61)
  Top 0.305: v44.96,30.48 RAM-62256P.9 47.5,33.97 36.07,45.4 36.07,49.53 v33.85,51.75 | v37.97,60.33 44,60.33 47.5,56.83 ADDLATCH.18
  Bottom 0.305: ROM-58C256.9 48.77,18.41 44.96,22.22 v44.96,30.48 | v37.97,60.33 34.8,60.33 33.85,59.37 v33.85,51.75
N$12  (via drill 0.61)
  Top 0.305: v44.96,41.59 v47.5,41.59
  Bottom 0.305: ROM-58C256.8 46.23,18.41 42.42,22.22 42.42,30.48 RAM-62256P.8 v44.96,41.59 | v47.5,41.59 47.5,43.82 48.77,45.09 48.77,49.53 45.28,53.02 45.28,56.52 ADDLATCH.17
N$13  (via drill 0.61)
  Top 0.305: RAM-62256P.7 v39.88,30.48 | v49.4,60.01 51.62,57.79 51.62,54.29 56.39,49.53 56.39,46.99 53.21,43.82 v49.09,43.82 | v48.77,40.32 44.32,40.32 v43.37,41.28
  Bottom 0.305: ROM-58C256.7 43.69,18.41 39.88,22.22 v39.88,30.48 | v49.4,60.01 45.91,60.01 42.74,56.83 ADDLATCH.16 | v49.09,43.82 49.09,43.18 48.77,42.86 v48.77,40.32 | v43.37,41.28 43.37,33.97 RAM-62256P.7
N$14  (via drill 0.61)
  Top 0.305: ROM-58C256.6 41.15,9.21 47.5,15.56 v56.39,15.56 | v64.33,30.48 v60.2,26.35 | v64.33,34.29 61.47,34.29 60.52,35.24 55.43,35.24 | 55.43,35.24 52.26,35.24 51.31,34.29 51.31,31.75 48.45,28.89 44.64,28.89 44,28.26 40.51,28.26 38.61,30.16 38.61,31.75 RAM-62256P.6 | 55.43,35.24 v46.23,44.45
  Bottom 0.305: v56.39,15.56 56.39,16.19 60.2,20 v60.2,26.35 | v64.33,34.29 v64.33,30.48 | v46.23,44.45 46.23,49.53 40.2,55.56 40.2,56.52 ADDLATCH.15
N$15  (via drill 0.61)
  Top 0.305: v37.66,52.07 37.66,56.52 ADDLATCH.14
  Bottom 0.305: ROM-58C256.5 38.61,20.95 37.34,22.22 RAM-62256P.5 37.34,33.97 36.07,35.24 36.07,49.53 37.66,51.12 v37.66,52.07
N$16  (via drill 0.61)
  Top 0.305: v28.45,30.16 28.45,38.42 29.4,39.37 30.04,39.37 30.99,38.42 | 30.99,38.42 34.8,34.61 RAM-62256P.4 | 30.99,38.42 30.99,50.48 34.8,54.29 34.8,56.52 ADDLATCH.13
  Bottom 0.305: ROM-58C256.4 36.07,12.06 31.62,16.51 31.62,17.78 27.18,22.22 27.18,28.89 v28.45,30.16
N$17  (via drill 0.61)
  Top 0.305: v33.53,16.19 ROM-58C256.3 | v28.45,26.99 22.1,33.34 22.1,33.97 28.45,40.32 28.45,49.53 32.26,53.34 32.26,56.52 ADDLATCH.12
  Bottom 0.305: v33.53,16.19 33.53,20.95 32.26,22.22 32.26,26.99 | RAM-62256P.3 32.26,26.99 | 32.26,26.99 v28.45,26.99
N$28  (via drill 0.61)
  Top 0.305: v34.48,86.68 41.15,86.68 DECODER.9 | v32.26,87.63 33.21,88.58 33.21,88.9 35.43,91.12 56.71,91.12 v57.66,92.08
  Bottom 0.305: v34.48,86.68 33.21,86.68 v32.26,87.63 | v57.66,92.08 109.41,92.08 139.57,61.91 139.57,56.2 142.11,53.66 143.06,53.66 144.02,52.71 144.02,23.81 143.38,23.18 136.72,23.18 127.83,14.29 126.87,14.29 PORTS-82C55A.36
N$44  (via drill 0.61)
  Top 0.305: R34.1 25.91,80.64 24.32,79.06 19.24,79.06 14.73,74.55 v14.48,74.55
  Bottom 0.305: v14.48,74.55 14.48,57.47 17.34,54.61 17.34,44.45 LED1.A
N$47  (via drill 0.61)
  Top 0.305: PORTS-82C55A.4 142.11,11.43 144.02,9.53 144.02,3.49 142.75,2.22 110.05,2.22 109.09,3.17 S6.4 108.78,3.49 102.43,3.49 S6.3 | v69.72,5.4 69.09,4.76 27.81,4.76 27.18,5.4 25.59,5.4 23.05,2.86 20.83,2.86 19.88,3.81 19.88,5.4 13.21,12.06 13.21,14.29 R15.1
  Bottom 0.305: v69.72,5.4 100.2,5.4 102.11,3.49 S6.3
N$49  (via drill 0.61)
  Top 0.305: v111.95,3.49 112.59,2.86 128.14,2.86 131.63,6.35 141.8,6.35 PORTS-82C55A.2 | S7.3 73.22,3.49 79.57,3.49 S7.4
  Bottom 0.305: R17.1 13.84,4.13 19.56,4.13 20.83,2.86 72.58,2.86 72.9,3.17 S7.3 | v111.95,3.49 110.36,1.91 81.15,1.91 79.88,3.17 S7.4
N$50
  Top 0.305: PORTS-82C55A.3 141.8,8.89 129.09,8.89 128.14,7.94 112.27,7.94 110.68,6.35 97.66,6.35 94.81,3.49 S5.4
  Bottom 0.305: R16.1 13.53,9.84 19.24,9.84 22.73,6.35 27.81,6.35 30.04,4.13 70.99,4.13 71.63,4.76 86.87,4.76 88.14,3.49 S5.3 88.46,3.49 94.49,3.49 S5.4
N$57  (via drill 0.61)
  Top 0.305: v43.69,29.53 43.69,36.2 v39.88,40.01 33.53,46.36 v33.53,50.17 | RAM-62256P.22 v39.88,45.72
  Bottom 0.305: v43.69,29.53 ROM-58C256.22 | v39.88,45.72 v39.88,40.01 | v33.53,50.17 32.58,51.12 32.58,52.39 31.3,53.66 31.3,65.72 33.21,67.63 42.1,67.63 43.37,68.9 43.37,72.07 42.42,73.02 42.1,73.02 41.15,73.98 DECODER.14
N$58
  Bottom 0.305: RAM-62256P.27 29.72,50.8 28.45,52.07 28.45,65.41 39.56,76.52 41.15,76.52 DECODER.13
N$60  (via drill 0.61)
  Top 0.305: RAM-62256P.20 45.28,50.48 v41.15,50.48 | v27.18,59.05 v35.12,59.05
  Bottom 0.305: v41.15,50.48 36.39,55.25 36.39,57.79 v35.12,59.05 | v27.18,59.05 26.23,59.05 23.68,56.52 23.05,56.52 18.29,61.28 NOT.4
N$80  (via drill 0.61)
  Top 0.305: v17.02,84.45 41.15,84.45 DECODER.10 | v14.48,86.99 14.48,88.58 21.46,95.57 106.87,95.57 144.65,57.79 144.65,16.83 142.11,14.29 PORTS-82C55A.5
  Bottom 0.305: v14.48,86.99 v17.02,84.45
RD  (via drill 0.61)
  Top 0.305: v57.98,62.87 49.4,71.44 48.77,71.44 DECODER.2 | v59.25,51.75 63.37,47.62 63.37,46.67 67.18,42.86 v67.18,40.01 | v95.12,23.81 98.3,20.64 8085.32 98.3,15.24 SL2.2
  Bottom 0.305: v57.98,62.87 57.98,53.02 v59.25,51.75 | v67.18,40.01 68.14,40.01 70.36,37.78 76.07,37.78 76.71,37.15 76.71,34.61 78.93,32.38 83.38,32.38 92.58,23.18 94.49,23.18 v95.12,23.81
READY  (via drill 0.61)
  Top 0.305: v24.64,46.67 24.64,73.66 30.35,79.38 30.35,80.01 R32.2 | v28.13,17.46 28.77,17.46 29.4,18.1 64.33,18.1 v64.96,17.46 | 8085.35 105.92,15.24 SL2.5
  Bottom 0.305: v24.64,46.67 24.64,24.45 25.27,23.81 25.27,20.32 v28.13,17.46 | v64.96,17.46 104.33,17.46 105.92,15.88 105.92,15.24 SL2.5
RES_IN
  Top 0.305: 8085.36 108.46,15.24 SL2.6 | C3.1 17.02,59.05 11.94,59.05 RESET.2
  Bottom 0.305: 31.62,75.56 23.05,66.99 17.97,66.99 17.02,66.04 17.02,59.05 C3.1 | 31.62,75.56 35.43,79.38 35.43,80.33 R31.2 | 31.62,75.56 11.3,75.56 9.4,73.66 9.4,73.34 7.81,71.75 4.95,71.75 3.05,73.66 3.05,88.27 9.72,94.93 107.51,94.93 144.65,57.79 144.65,21.91 143.38,20.64 140.84,20.64 133.22,13.02 110.68,13.02 109.73,13.97 109.73,14.29 108.78,15.24 SL2.6
RES_OUT
  Top 0.305: 8085.3 113.54,40.32 SL4.8
  Bottom 0.305: 8085.3 113.54,29.84 126.56,16.83 PORTS-82C55A.35
RS  (via drill 0.61)
  Top 0.305: v131.95,57.15 111.32,57.15 80.52,87.95 LCD1.4
  Bottom 0.305: v131.95,57.15 131.95,49.53 141.8,39.69 PORTS-82C55A.15
RST5_5  (via drill 0.61)
  Top 0.305: v24.32,88.9 27.81,92.39 v49.4,92.39 | v59.25,82.55 59.25,81.91 v85.28,55.88 | v95.38,46.67 95.12,44.13 98.62,40.64 SL4.2 98.3,40.32 8085.9
  Bottom 0.305: v24.32,88.9 16.07,80.64 R2.2 | v59.25,82.55 v49.4,92.39 | v85.28,55.88 87.82,53.34 88.46,53.34 v95.38,46.67
RST6_5  (via drill 0.61)
  Top 0.305: v57.66,80.33 59.25,80.33 84.96,54.61 86.87,54.61 v87.5,55.75 | 101.16,40.64 SL4.3 | 8085.8 100.84,40.32 SL4.3 | v97.22,46.8 97.22,44.26 98.23,44.26 101.09,41.4 SL4.3
  Bottom 0.305: v57.66,80.33 56.39,79.06 55.75,79.06 53.53,81.28 53.53,86.68 48.45,91.76 11.62,91.76 7.81,87.95 5.59,87.95 R3.2 | 97.22,47.43 v97.22,46.8 95.5,48.51 94.49,48.51 87.76,55.25 v87.5,55.75
RST7_5  (via drill 0.61)
  Top 0.305: v53.53,76.2 53.53,73.98 74.68,52.83 78.23,52.83 78.99,53.59 88.39,53.59 89.6,54.8 v89.6,55.75 | v98.81,47.31 103.7,40.64 SL4.4 103.38,40.32 8085.7
  Bottom 0.305: v53.53,76.2 52.89,76.83 52.89,86.36 48.45,90.8 11.62,90.8 9.72,88.9 9.72,82.55 5.27,78.1 5.27,74.61 R4.2 | v98.81,47.31 98.23,47.31 92.71,52.83 91.5,52.83 v89.6,55.75
S0
  Top 0.305: 8085.29 90.68,15.24 SL1.9
S1
  Top 0.305: 8085.33 100.84,15.24 SL2.3
SID  (via drill 0.61)
  Top 0.305: 8085.5 108.46,40.32 SL4.6 108.46,40.64 108.46,43.5 104.97,46.99 104.97,47.94 99.25,53.66 91.63,53.66 | v21.46,56.52 14.48,63.5 14.48,66.04 v7.49,73.02 | v63.37,83.82 63.37,82.55 77.09,68.83 82.3,68.83 91.63,59.5 91.63,53.66 | 91.63,53.66 90.04,52.07 87.19,52.07 SID.2 86.87,51.75 84.65,51.75 83.06,50.17 79.25,50.17 78.61,50.8 C11.1
  Bottom 0.305: v21.46,56.52 21.46,43.82 21.14,43.5 21.14,25.72 R6.2 | v7.49,73.02 4.63,73.02 3.68,73.98 3.68,87.95 9.4,93.66 52.89,93.66 62.74,83.82 v63.37,83.82
SOD  (via drill 0.61)
  Top 0.305: SL4.7 111,40.32 8085.4 111,35.56 112.9,33.66 118.94,33.66 119.89,34.61 119.89,38.42 122.43,40.96 127.83,40.96 130.05,38.74 130.05,20 128.14,18.1 125.6,18.1 122.75,15.24 v122.75,11.75 | v25.91,4.13 70.99,4.13 71.63,4.76 90.36,4.76 93.22,1.91 97.98,1.91 101.79,5.71 v122.75,5.71
  Bottom 0.305: v25.91,4.13 24.32,5.71 15.75,5.71 12.26,9.21 12.26,11.75 8.76,15.24 8.13,15.24 SL5.2 | v122.75,11.75 v122.75,5.71
TRAP  (via drill 0.61)
  Top 0.305: v52.26,74.93 52.26,70.17 64.64,57.79 64.64,56.2 v72.58,48.26 | 8085.6 105.92,40.32 SL4.5 | v76.14,44.7 85.6,44.45 v85.73,44.32
  Bottom 0.305: v52.26,74.93 52.26,86.04 48.13,90.17 16.07,90.17 14.16,88.27 10.99,88.27 R5.2 | v76.14,44.7 v72.58,48.26 | SL4.5 106.23,40.64 102.3,44.58 v85.73,44.32
VCC  (via drill 0.61)
  Top 0.508: C5.1 RAM-62256P.28 27.18,47.62 16.7,37.15 | U$2.VBUS 9.72,35.56 14.48,35.56 C1.1 | 16.7,37.15 14.8,35.24 C1.1 | C4.+ 6.22,45.4 14.48,37.15 16.7,37.15 | R17.2 21.14,4.45 21.14,9.84 R16.2 20.83,10.16 20.83,14.29 R15.2 20.51,14.61 9.72,25.4 | 28.45,23.5 26.86,23.5 | 26.86,23.5 24,23.5 C16.1 23.68,23.5 15.43,23.5 13.53,25.4 R6.1 13.21,25.4 9.72,25.4 | 28.45,23.5 30.99,23.5 ROM-58C256.27 | 28.45,23.5 ROM-58C256.28 | 9.72,25.4 9.08,25.4 8.13,24.45 SL6.2 | 26.86,23.5 15.11,35.24 C1.1 | C7.1 NOT.14 | R32.1 30.35,87.95 26.23,87.95 25.91,88.27 R34.2 | C9.1 124.02,39.37 124.02,38.35 | PORTS-82C55A.26 126.56,39.37 125.03,39.37 124.02,38.35 | C15.1 119.25,10.16 119.25,14.92 118.94,15.24 SL2.10 118.62,15.24 8085.40 118.62,20.64 124.02,26.04 124.02,38.35 | C6.1 75.12,93.34 75.12,88.27 LCD1.2 75.12,87.95 73.37,86.2 | ADDLATCH.20 52.89,56.52 56.07,56.52 56.39,56.2 C8.1 | 54.8,81.91 55.75,81.91 U$3.P$1 58.93,85.09 72.26,85.09 73.37,86.2 | 54.8,81.91 48.77,81.91 | 54.8,81.91 v54.8,74.3 | 48.77,81.91 46.7,79.85 | 46.7,79.85 46.55,79.69 46.55,74.3 42.42,70.17 42.1,70.17 41.15,69.21 DECODER.16 | 48.77,81.91 DECODER.6 | v122.43,42.23 122.43,44.77 81.15,86.04 73.53,86.04 73.37,86.2 | R31.1 35.75,88.27 42.42,88.27 46.55,84.14 46.55,80.01 46.7,79.85
  Bottom 0.508: R31.1 35.43,88.27 33.21,88.27 32.58,88.9 31.62,88.9 30.67,87.95 R32.1 | C7.1 10.67,76.83 14.48,76.83 25.91,88.27 R34.2 | C10.1 37.02,69.21 41.15,69.21 DECODER.16 | v54.8,74.3 54.8,63.5 52.89,61.6 52.89,56.83 ADDLATCH.20 | v122.43,42.23 122.43,39.37 C9.1 | NOT.14 9.08,70.8 9.08,55.56 6.22,52.71 6.22,45.72 C4.+
WR  (via drill 0.61)
  Top 0.305: SL2.1 95.76,15.24 8085.31 95.76,20.64 93.85,22.54 69.72,22.54 v68.52,20.83 | v23.37,57.79 23.37,51.12 24,50.48 24,48.26 v23.37,47.62 | v23.37,33.66 32.26,24.77 32.26,22.22 35.12,19.37 64.96,19.37 v65.91,20.32
  Bottom 0.305: v23.37,57.79 24.64,59.05 24.64,66.04 37.02,78.42 37.02,85.41 39.88,88.27 42.42,88.27 43.37,87.31 43.37,74.61 48.77,69.21 DECODER.1 | v23.37,33.66 v23.37,47.62 | v65.91,20.32 67.5,20.32 v68.52,20.83
X1
  Top 0.305: 8085.1 118.62,40.32 SL4.10 117.98,41.28 117.98,46.99 Q2.1
X2
  Top 0.305: 8085.2 116.08,40.32 SL4.9 116.08,40.64 116.08,43.82 112.9,46.99 Q2.2 112.59,47.31 106.23,47.31 C2.1